# EAGLE board SAMD21_Pro_RF_1W-Panel (EAGLE 9.1.3), part 1 of 3
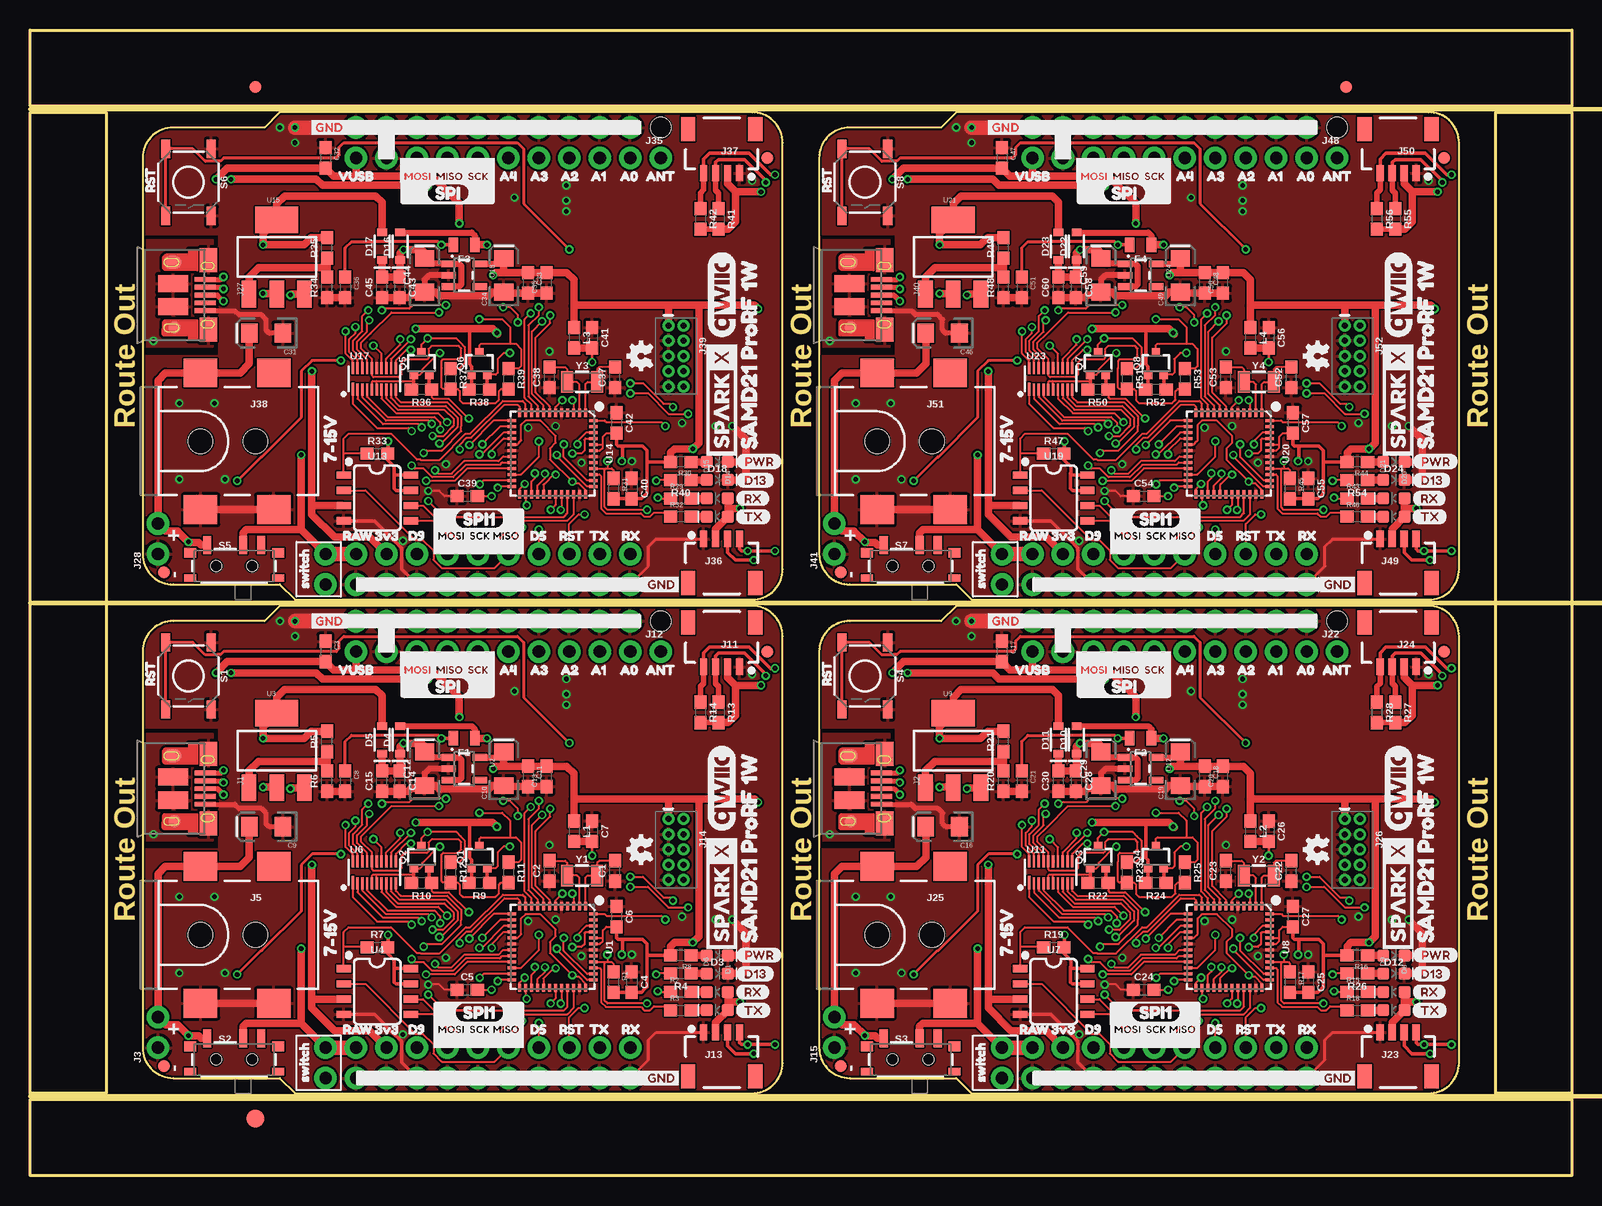
[diagram p0: board, top side]
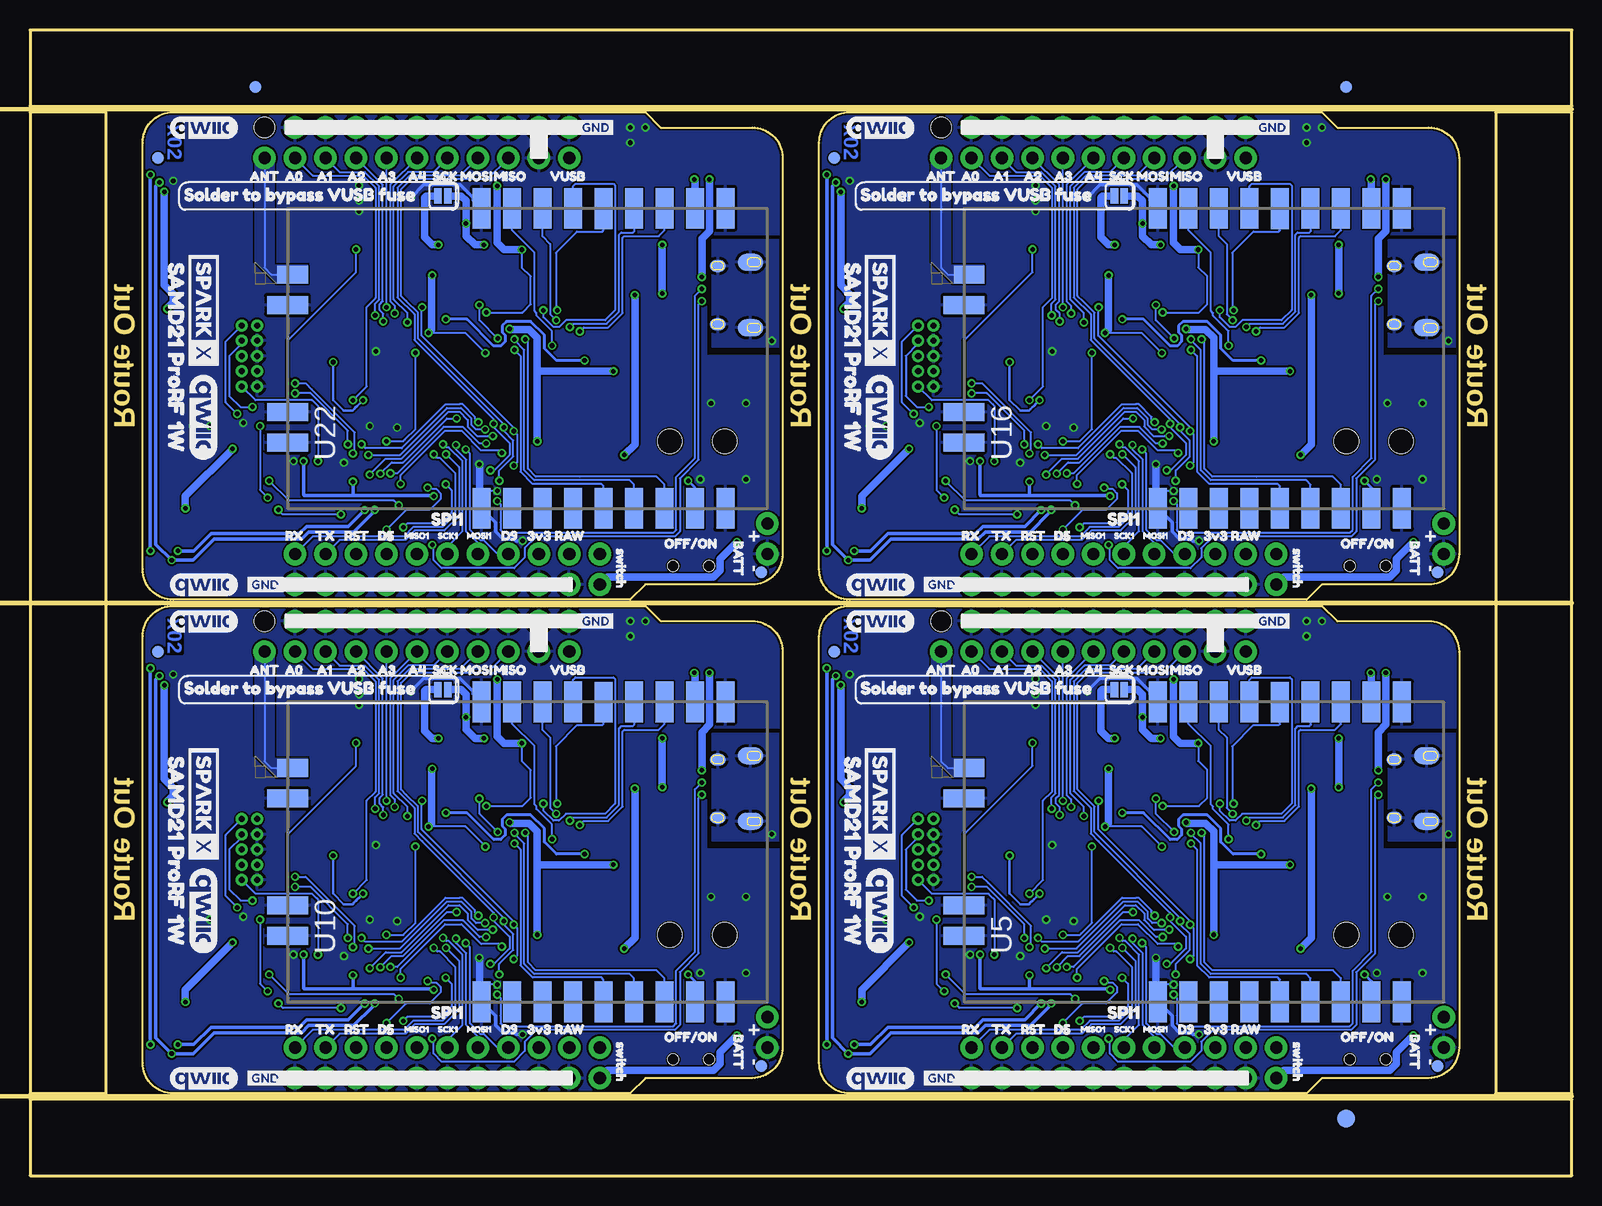
[diagram p1: board, bottom side, seen from below]

Size 128.52 x 95.5 mm. Coordinates in mm from the lower left corner, seen from the top.
Outline: 20.83,8.13 22.1,6.86 60.2,6.86 arc90 62.74,9.4 62.74,44.96 arc90 60.2,47.5 20.83,47.5 19.56,46.23 11.94,46.23 arc90 9.4,43.69 9.4,10.67 arc90 11.94,8.13 20.83,8.13
Outline: 77.22,8.13 78.49,6.86 116.59,6.86 arc90 119.13,9.4 119.13,44.96 arc90 116.59,47.5 77.22,47.5 75.95,46.23 68.33,46.23 arc90 65.79,43.69 65.79,10.67 arc90 68.33,8.13 77.22,8.13
Outline: 20.83,49.28 22.1,48.01 60.2,48.01 arc90 62.74,50.55 62.74,86.11 arc90 60.2,88.65 20.83,88.65 19.56,87.38 11.94,87.38 arc90 9.4,84.84 9.4,51.82 arc90 11.94,49.28 20.83,49.28
Outline: 77.22,49.28 78.49,48.01 116.59,48.01 arc90 119.13,50.55 119.13,86.11 arc90 116.59,88.65 77.22,88.65 75.95,87.38 68.33,87.38 arc90 65.79,84.84 65.79,51.82 arc90 68.33,49.28 77.22,49.28
Outline: 0,6.35 128.52,6.35 128.52,0 0,0 0,6.35
Outline: 122.17,88.65 128.52,88.65 128.52,6.86 122.17,6.86 122.17,88.65
Outline: 0,95.5 128.52,95.5 128.52,89.15 0,89.15 0,95.5
Outline: 0,88.65 6.35,88.65 6.35,6.86 0,6.86 0,88.65
Copper layers (1*16): Top 0.035mm / dielectric 1.5mm / Bottom 0.035mm
Design rules "SparkFun-2-layer-PCBWay-LIMIT": minimum track width 6mil, minimum drill 0.3mm, track to track 6mil, track to pad 6mil, pad to pad 6mil, via to via 6mil, smd to smd 6mil, copper to edge 6mil, drill to drill 6mil, minimum pad ring 6mil, minimum via ring 6mil, stop-mask expansion 4mil, vias tented up to drill 25mil, thermal gap 10mil
Net classes: 0 default: width 0 mm, drill 0 mm; 1 vcc: width 0 mm
Holes 1.7 mm at 52.58,46.23 108.97,46.23 52.58,87.38 108.97,87.38
Milling: 3 lines

## Footprints (pad centres in the part's own frame; a part is rotated, then mirrored left to right if it is on the bottom)
0603 = smd 1.1 x 1: 1 -0.85,0; 2 0.85,0
EIA3216 = smd 1.4 x 1.6: + 1.4,0; - -1.4,0
LED-0603 = smd 1 x 1: A -0.877,0; C 0.877,0
SOD-323 = smd 0.63 x 0.83: A 1.15,0; C -1.15,0
FIDUCIAL-1X2 = smd 1 x 1: 1 0,0
FIDUCIAL-1.5X3 = smd 1.5 x 1.5: 1 0,0
0805 = smd 0.8 x 1.2: 1 -0.9,0; 2 0.9,0
USB-MICROB-PTH-MILL = smd 0.4 x 1.75: D+ 0,0; D- -0.65,0; GND 1.3,0; ID 0.65,0; VBUS -1.3,0 | smd 2 x 1.46: SHIELD -2.9,0.275; SHIELD2 2.9,0.275 | smd 1.425 x 2.5: SHIELD3 -0.963,-2.675; SHIELD4 0.963,-2.675 | smd 1.4 x 2.1 bottom: SHIELD5 -2.731,-2.531; SHIELD7 2.729,-2.531 | smd 1 x 1: SHIELD6 2.7,-2.575 | smd 1.1 x 1.5: SHIELD8 -2.731,-2.731 | smd 1 x 1.3 bottom: SHIELD9 -2.43,0.195; SHIELD10 2.43,0.195
1X02_NO_SILK = drill 1.016 pad 1.88: 1 0,0; 2 2.54,0
POWER_JACK_SMD = smd 2.8 x 2.4: GND 0,-5.7; P$4 6.1,-5.7; VIN0 0,5.7; VIN1 6.1,5.7 | hole 2.032: 0,0; 4.572,0
1X10_NO_SILK = drill 1.016 pad 1.88: 1 0,0; 2 2.54,0; 3 5.08,0; 4 7.62,0; 5 10.16,0; 6 12.7,0; 7 15.24,0; 8 17.78,0; 9 20.32,0; 10 22.86,0
1X09_NO_SILK = drill 1.016 pad 1.88: 1 0,0; 2 2.54,0; 3 5.08,0; 4 7.62,0; 5 10.16,0; 6 12.7,0; 7 15.24,0; 8 17.78,0; 9 20.32,0
1X04_1MM_RA = smd 0.6 x 1.35: 1 -1.5,0; 2 -0.5,0; 3 0.5,0; 4 1.5,0 | smd 1.2 x 2: NC1 2.8,-3.675; NC2 -2.8,-3.675
1X01_NO_SILK = drill 1.016 pad 1.88: 1 0,0
2X5-PTH-1.27MM = drill 0.508 pad 1: 1 -2.54,-0.635; 2 -2.54,0.635; 3 -1.27,-0.635; 4 -1.27,0.635; 5 0,-0.635; 6 0,0.635; 7 1.27,-0.635; 8 1.27,0.635; 9 2.54,-0.635; 10 2.54,0.635
SMT-JUMPER_2_NO_SILK = smd 0.635 x 1.27: 1 -0.406,0; 2 0.406,0
SOT323 = smd 0.7 x 0.7: 1 -0.65,-0.925; 2 0.65,-0.925; 3 0,0.925
TACTILE_SWITCH_SMD_5.2MM = smd 1.524 x 0.762: 1 -2.794,1.905; 2 2.794,1.905; 3 -2.794,-1.905; 4 2.794,-1.905
SWITCH_SPST_SMD_A = smd 0.7 x 1.5: 1 -2.25,-1.75; 2 -0.75,-1.75; 3 2.25,-1.75 | smd 1 x 0.6: GND1 -3.65,1; GND3 3.65,1 | smd 1 x 0.8: GND2 -3.65,-1.1; GND4 3.65,-1.1 | hole 0.9: -1.5,0; 1.5,0
QFN-48_NO_EXPOSED_PAD = smd 0.7 x 0.25: 1 -3.4,2.75; 2 -3.4,2.25; 3 -3.4,1.75; 4 -3.4,1.25; 5 -3.4,0.75; 6 -3.4,0.25; 7 -3.4,-0.25; 8 -3.4,-0.75; 9 -3.4,-1.25; 10 -3.4,-1.75; 11 -3.4,-2.25; 12 -3.4,-2.75; 25 3.4,-2.75; 26 3.4,-2.25; 27 3.4,-1.75; 28 3.4,-1.25; 29 3.4,-0.75; 30 3.4,-0.25; 31 3.4,0.25; 32 3.4,0.75; 33 3.4,1.25; 34 3.4,1.75; 35 3.4,2.25; 36 3.4,2.75 | smd 0.25 x 0.7: 13 -2.75,-3.4; 14 -2.25,-3.4; 15 -1.75,-3.4; 16 -1.25,-3.4; 17 -0.75,-3.4; 18 -0.25,-3.4; 19 0.25,-3.4; 20 0.75,-3.4; 21 1.25,-3.4; 22 1.75,-3.4; 23 2.25,-3.4; 24 2.75,-3.4; 37 2.75,3.4; 38 2.25,3.4; 39 1.75,3.4; 40 1.25,3.4; 41 0.75,3.4; 42 0.25,3.4; 43 -0.25,3.4; 44 -0.75,3.4; 45 -1.25,3.4; 46 -1.75,3.4; 47 -2.25,3.4; 48 -2.75,3.4
SOT23-5 = smd 0.55 x 1.2: 1 -0.95,-1.3; 2 0,-1.3; 3 0.95,-1.3; 4 0.95,1.3; 5 -0.95,1.3
SOT223 = smd 1.219 x 2.235: 1 -2.311,-3.099; 2 0,-3.099; 3 2.311,-3.099 | smd 3.6 x 2.2: 4 0,3.099
SO08 = smd 0.6 x 1.2: 1 -1.905,-2.8; 2 -0.635,-2.8; 3 0.635,-2.8; 4 1.905,-2.8; 5 1.905,2.8; 6 0.635,2.8; 7 -0.635,2.8; 8 -1.905,2.8
E19-915MS1W = smd 3.4 x 1.5: P$1 0,23.82; P$2 0,21.28; P$3 0,18.74; P$4 0,16.2; P$5 0,13.66; P$6 0,11.12; P$7 0,8.58; P$8 0,6.04; P$9 0,3.5; P$10 25,3.5; P$11 25,6.04; P$12 25,8.58; P$13 25,11.12; P$14 24.98,13.66; P$15 25,16.2; P$16 25,18.74; P$17 25,21.28; P$18 25,23.82 | smd 1.5 x 2.55: P$19 19.5,39.568 | smd 1.5 x 3.4: P$20 16.96,40; P$21 8.04,40; P$22 5.5,40
UFDFN-20 = smd 0.2 x 1.1: 1 -1.8,-0.85 | smd 0.2 x 1: 2 -1.4,-0.9; 3 -1,-0.9; 4 -0.6,-0.9; 5 -0.2,-0.9; 6 0.2,-0.9; 7 0.6,-0.9; 8 1,-0.9; 9 1.4,-0.9; 10 1.8,-0.9; 11 1.8,0.9; 12 1.4,0.9; 13 1,0.9; 14 0.6,0.9; 15 0.2,0.9; 16 -0.2,0.9; 17 -0.6,0.9; 18 -1,0.9; 19 -1.4,0.9; 20 -1.8,0.9
CRYSTAL-SMD-3.2X1.5MM = smd 1 x 1.8: P$1 -1.25,0; P$2 1.25,0

## Placement (x,y rotation side)
C1  15pF  [0603]  48.77,25.4 90 top
C2  15pF  [0603]  43.31,25.4 90 top
C3  0.1uF  [0603]  24.64,43.69 270 top
C4  0.1uF  [0603]  50.17,16.13 270 top
C5  0.1uF  [0603]  36.45,15.49 0 top
C6  0.1uF  [0603]  48.89,21.59 270 top
C7  0.1uF  [0603]  46.86,28.7 270 top
C8  4.7uF  [0603]  26.29,32.89 270 top
C9  10uF  [EIA3216]  19.69,29.08 180 top
C10  10uF  [EIA3216]  39.5,33.91 90 top
C11  1.0uF  [0603]  41.53,33.27 270 top
C12  10uF  [EIA3216]  32.89,33.91 90 top
C13  0.1uF  [0603]  43.05,33.27 90 top
C14  1.0uF  [0603]  30.81,32.89 270 top
C15  0.1uF  [0603]  29.34,32.89 90 top
C16  10uF  [EIA3216]  76.07,29.08 180 top
C17  0.1uF  [0603]  81.03,43.69 270 top
C18  1.0uF  [0603]  97.92,33.27 270 top
C19  10uF  [EIA3216]  95.88,33.91 90 top
C20  0.1uF  [0603]  99.44,33.27 90 top
C21  4.7uF  [0603]  82.68,32.89 270 top
C22  15pF  [0603]  105.16,25.4 90 top
C23  15pF  [0603]  99.69,25.4 90 top
C24  0.1uF  [0603]  92.84,15.49 0 top
C25  0.1uF  [0603]  106.55,16.13 270 top
C26  0.1uF  [0603]  103.25,28.7 270 top
C27  0.1uF  [0603]  105.28,21.59 270 top
C28  1.0uF  [0603]  87.2,32.89 270 top
C29  10uF  [EIA3216]  89.28,33.91 90 top
C30  0.1uF  [0603]  85.72,32.89 90 top
C31  10uF  [EIA3216]  19.69,70.23 180 top
C32  0.1uF  [0603]  24.64,84.84 270 top
C33  1.0uF  [0603]  41.53,74.42 270 top
C34  10uF  [EIA3216]  39.5,75.06 90 top
C35  0.1uF  [0603]  43.05,74.42 90 top
C36  4.7uF  [0603]  26.29,74.04 270 top
C37  15pF  [0603]  48.77,66.55 90 top
C38  15pF  [0603]  43.31,66.55 90 top
C39  0.1uF  [0603]  36.45,56.64 0 top
C40  0.1uF  [0603]  50.17,57.28 270 top
C41  0.1uF  [0603]  46.86,69.85 270 top
C42  0.1uF  [0603]  48.89,62.74 270 top
C43  1.0uF  [0603]  30.81,74.04 270 top
C44  10uF  [EIA3216]  32.89,75.06 90 top
C45  0.1uF  [0603]  29.34,74.04 90 top
C46  10uF  [EIA3216]  76.07,70.23 180 top
C47  0.1uF  [0603]  81.03,84.84 270 top
C48  1.0uF  [0603]  97.92,74.42 270 top
C49  10uF  [EIA3216]  95.88,75.06 90 top
C50  0.1uF  [0603]  99.44,74.42 90 top
C51  4.7uF  [0603]  82.68,74.04 270 top
C52  15pF  [0603]  105.16,66.55 90 top
C53  15pF  [0603]  99.69,66.55 90 top
C54  0.1uF  [0603]  92.84,56.64 0 top
C55  0.1uF  [0603]  106.55,57.28 270 top
C56  0.1uF  [0603]  103.25,69.85 270 top
C57  0.1uF  [0603]  105.28,62.74 270 top
C58  1.0uF  [0603]  87.2,74.04 270 top
C59  10uF  [EIA3216]  89.28,75.06 90 top
C60  0.1uF  [0603]  85.72,74.04 90 top
D1  Yellow  [LED-0603]  57.3,15.3 180 top
D2  Green  [LED-0603]  57.3,13.78 180 top
D3  BLUE  [LED-0603]  57.3,16.84 0 top
D4  3A/10V/300mV  [SOD-323]  30.86,36.32 90 top
D5  3A/10V/300mV  [SOD-323]  29.34,36.32 90 top
D6  RED  [LED-0603]  57.3,18.35 0 top
D7  Green  [LED-0603]  113.69,13.78 180 top
D8  Yellow  [LED-0603]  113.69,15.3 180 top
D9  RED  [LED-0603]  113.69,18.35 0 top
D10  3A/10V/300mV  [SOD-323]  87.25,36.32 90 top
D11  3A/10V/300mV  [SOD-323]  85.72,36.32 90 top
D12  BLUE  [LED-0603]  113.69,16.84 0 top
D13  Green  [LED-0603]  57.3,54.93 180 top
D14  Yellow  [LED-0603]  57.3,56.45 180 top
D15  RED  [LED-0603]  57.3,59.5 0 top
D16  3A/10V/300mV  [SOD-323]  30.86,77.47 90 top
D17  3A/10V/300mV  [SOD-323]  29.34,77.47 90 top
D18  BLUE  [LED-0603]  57.3,57.99 0 top
D19  Green  [LED-0603]  113.69,54.93 180 top
D20  Yellow  [LED-0603]  113.69,56.45 180 top
D21  RED  [LED-0603]  113.69,59.5 0 top
D22  3A/10V/300mV  [SOD-323]  87.25,77.47 90 top
D23  3A/10V/300mV  [SOD-323]  85.72,77.47 90 top
D24  BLUE  [LED-0603]  113.69,57.99 0 top
E$1  [FIDUCIAL-1X2]  18.8,90.74 0 top
E$2  [FIDUCIAL-1X2]  18.8,90.74 0 bottom
E$3  [FIDUCIAL-1X2]  109.73,90.74 0 top
E$4  [FIDUCIAL-1X2]  109.73,90.74 0 bottom
E$5  [FIDUCIAL-1.5X3]  18.8,4.76 0 top
E$6  [FIDUCIAL-1.5X3]  18.8,4.76 0 bottom
F1  6V 0.5A  [0805]  36.2,36.45 180 top
F2  6V 0.5A  [0805]  92.58,36.45 180 top
F3  6V 0.5A  [0805]  36.2,77.6 180 top
F4  6V 0.5A  [0805]  92.58,77.6 180 top
FD1  FIDUCIAL1X2  [FIDUCIAL-1X2]  61.47,43.69 0 bottom
FD2  FIDUCIAL1X2  [FIDUCIAL-1X2]  11.18,9.14 0 top
FD3  FIDUCIAL1X2  [FIDUCIAL-1X2]  11.18,9.14 0 bottom
FD4  FIDUCIAL1X2  [FIDUCIAL-1X2]  61.47,43.69 0 top
FD5  FIDUCIAL1X2  [FIDUCIAL-1X2]  67.56,9.14 0 bottom
FD6  FIDUCIAL1X2  [FIDUCIAL-1X2]  117.86,43.69 0 bottom
FD7  FIDUCIAL1X2  [FIDUCIAL-1X2]  67.56,9.14 0 top
FD8  FIDUCIAL1X2  [FIDUCIAL-1X2]  117.86,43.69 0 top
FD9  FIDUCIAL1X2  [FIDUCIAL-1X2]  11.18,50.29 0 bottom
FD10  FIDUCIAL1X2  [FIDUCIAL-1X2]  61.47,84.84 0 bottom
FD11  FIDUCIAL1X2  [FIDUCIAL-1X2]  11.18,50.29 0 top
FD12  FIDUCIAL1X2  [FIDUCIAL-1X2]  61.47,84.84 0 top
FD13  FIDUCIAL1X2  [FIDUCIAL-1X2]  67.56,50.29 0 bottom
FD14  FIDUCIAL1X2  [FIDUCIAL-1X2]  117.86,84.84 0 bottom
FD15  FIDUCIAL1X2  [FIDUCIAL-1X2]  67.56,50.29 0 top
FD16  FIDUCIAL1X2  [FIDUCIAL-1X2]  117.86,84.84 0 top
J1  [USB-MICROB-PTH-MILL]  14.61,32.26 270 top
J2  [USB-MICROB-PTH-MILL]  70.99,32.26 270 top
J3  PTH  [1X02_NO_SILK]  10.67,10.67 90 top
J4  [1X02_NO_SILK]  27.18,46.23 270 top
J5  5.5x2.1mm Barrel  [POWER_JACK_SMD]  14.22,20.07 0 top
J6  [1X10_NO_SILK]  27.18,10.67 0 top
J7  [1X09_NO_SILK]  29.72,43.69 0 top
J8  External On/Off  [1X02_NO_SILK]  24.64,10.67 270 top
J9  [1X09_NO_SILK]  29.72,46.23 0 top
J10  [1X10_NO_SILK]  27.18,8.13 0 top
J11  [1X04_1MM_RA]  57.66,42.42 180 top
J12  [1X01_NO_SILK]  52.58,43.69 0 top
J13  [1X04_1MM_RA]  57.66,11.94 0 top
J14  CORTEX_DEBUG_PTH  [2X5-PTH-1.27MM]  53.85,27.18 270 top
J15  PTH  [1X02_NO_SILK]  67.06,10.67 90 top
J16  [1X02_NO_SILK]  83.57,46.23 270 top
J17  External On/Off  [1X02_NO_SILK]  81.03,10.67 270 top
J18  [1X10_NO_SILK]  83.57,10.67 0 top
J19  [1X10_NO_SILK]  83.57,8.13 0 top
J20  [1X09_NO_SILK]  86.11,46.23 0 top
J21  [1X09_NO_SILK]  86.11,43.69 0 top
J22  [1X01_NO_SILK]  108.97,43.69 0 top
J23  [1X04_1MM_RA]  114.05,11.94 0 top
J24  [1X04_1MM_RA]  114.05,42.42 180 top
J25  5.5x2.1mm Barrel  [POWER_JACK_SMD]  70.61,20.07 0 top
J26  CORTEX_DEBUG_PTH  [2X5-PTH-1.27MM]  110.24,27.18 270 top
J27  [USB-MICROB-PTH-MILL]  14.61,73.41 270 top
J28  PTH  [1X02_NO_SILK]  10.67,51.82 90 top
J29  [1X02_NO_SILK]  27.18,87.38 270 top
J30  External On/Off  [1X02_NO_SILK]  24.64,51.82 270 top
J31  [1X10_NO_SILK]  27.18,51.82 0 top
J32  [1X10_NO_SILK]  27.18,49.28 0 top
J33  [1X09_NO_SILK]  29.72,87.38 0 top
J34  [1X09_NO_SILK]  29.72,84.84 0 top
J35  [1X01_NO_SILK]  52.58,84.84 0 top
J36  [1X04_1MM_RA]  57.66,53.09 0 top
J37  [1X04_1MM_RA]  57.66,83.57 180 top
J38  5.5x2.1mm Barrel  [POWER_JACK_SMD]  14.22,61.21 0 top
J39  CORTEX_DEBUG_PTH  [2X5-PTH-1.27MM]  53.85,68.33 270 top
J40  [USB-MICROB-PTH-MILL]  70.99,73.41 270 top
J41  PTH  [1X02_NO_SILK]  67.06,51.82 90 top
J42  [1X02_NO_SILK]  83.57,87.38 270 top
J43  External On/Off  [1X02_NO_SILK]  81.03,51.82 270 top
J44  [1X10_NO_SILK]  83.57,51.82 0 top
J45  [1X10_NO_SILK]  83.57,49.28 0 top
J46  [1X09_NO_SILK]  86.11,87.38 0 top
J47  [1X09_NO_SILK]  86.11,84.84 0 top
J48  [1X01_NO_SILK]  108.97,84.84 0 top
J49  [1X04_1MM_RA]  114.05,53.09 0 top
J50  [1X04_1MM_RA]  114.05,83.57 180 top
J51  5.5x2.1mm Barrel  [POWER_JACK_SMD]  70.61,61.21 0 top
J52  CORTEX_DEBUG_PTH  [2X5-PTH-1.27MM]  110.24,68.33 270 top
JP1  FuseBypass  [SMT-JUMPER_2_NO_SILK]  37.72,40.51 0 bottom
JP2  FuseBypass  [SMT-JUMPER_2_NO_SILK]  94.11,40.51 0 bottom
JP3  FuseBypass  [SMT-JUMPER_2_NO_SILK]  37.72,81.66 0 bottom
JP4  FuseBypass  [SMT-JUMPER_2_NO_SILK]  94.11,81.66 0 bottom
L1  [0603]  45.34,28.7 270 top
L2  [0603]  101.73,28.7 270 top
L3  [0603]  45.34,69.85 270 top
L4  [0603]  101.73,69.85 270 top
Q1  310mA/60V/1.6Ω  [SOT323]  37.47,26.54 0 top
Q2  310mA/60V/1.6Ω  [SOT323]  32.64,26.54 0 top
Q3  310mA/60V/1.6Ω  [SOT323]  89.03,26.54 0 top
Q4  310mA/60V/1.6Ω  [SOT323]  93.85,26.54 0 top
Q5  310mA/60V/1.6Ω  [SOT323]  32.64,67.69 0 top
Q6  310mA/60V/1.6Ω  [SOT323]  37.47,67.69 0 top
Q7  310mA/60V/1.6Ω  [SOT323]  89.03,67.69 0 top
Q8  310mA/60V/1.6Ω  [SOT323]  93.85,67.69 0 top
R1  10k  [0603]  48.64,16.13 270 top
R2  1k  [0603]  54.25,15.3 0 top
R3  1k  [0603]  54.25,13.78 0 top
R4  1k  [0603]  54.25,16.84 180 top
R5  240  [0603]  24.77,36.2 90 top
R6  750  [0603]  24.77,32.89 90 top
R7  10k  [0603]  28.96,19.02 0 top
R8  1k  [0603]  54.25,18.35 180 top
R9  10k  [0603]  37.47,24.38 180 top
R10  10k  [0603]  32.64,24.38 180 top
R11  10k  [0603]  39.88,25.27 270 top
R12  10k  [0603]  35.05,25.27 270 top
R13  2.2k  [0603]  57.4,38.61 270 top
R14  2.2k  [0603]  55.88,38.61 270 top
R15  1k  [0603]  110.64,15.3 0 top
R16  1k  [0603]  110.64,18.35 180 top
R17  10k  [0603]  105.03,16.13 270 top
R18  1k  [0603]  110.64,13.78 0 top
R19  10k  [0603]  85.34,19.02 0 top
R20  750  [0603]  81.15,32.89 90 top
R21  240  [0603]  81.15,36.2 90 top
R22  10k  [0603]  89.03,24.38 180 top
R23  10k  [0603]  91.44,25.27 270 top
R24  10k  [0603]  93.85,24.38 180 top
R25  10k  [0603]  96.27,25.27 270 top
R26  1k  [0603]  110.64,16.84 180 top
R27  2.2k  [0603]  113.79,38.61 270 top
R28  2.2k  [0603]  112.27,38.61 270 top
R29  1k  [0603]  54.25,56.45 0 top
R30  1k  [0603]  54.25,59.5 180 top
R31  10k  [0603]  48.64,57.28 270 top
R32  1k  [0603]  54.25,54.93 0 top
R33  10k  [0603]  28.96,60.17 0 top
R34  750  [0603]  24.77,74.04 90 top
R35  240  [0603]  24.77,77.34 90 top
R36  10k  [0603]  32.64,65.53 180 top
R37  10k  [0603]  35.05,66.42 270 top
R38  10k  [0603]  37.47,65.53 180 top
R39  10k  [0603]  39.88,66.42 270 top
R40  1k  [0603]  54.25,57.99 180 top
R41  2.2k  [0603]  57.4,79.76 270 top
R42  2.2k  [0603]  55.88,79.76 270 top
R43  1k  [0603]  110.64,56.45 0 top
R44  1k  [0603]  110.64,59.5 180 top
R45  10k  [0603]  105.03,57.28 270 top
R46  1k  [0603]  110.64,54.93 0 top
R47  10k  [0603]  85.34,60.17 0 top
R48  750  [0603]  81.15,74.04 90 top
R49  240  [0603]  81.15,77.34 90 top
R50  10k  [0603]  89.03,65.53 180 top
R51  10k  [0603]  91.44,66.42 270 top
R52  10k  [0603]  93.85,65.53 180 top
R53  10k  [0603]  96.27,66.42 270 top
R54  1k  [0603]  110.64,57.99 180 top
R55  2.2k  [0603]  113.79,79.76 270 top
R56  2.2k  [0603]  112.27,79.76 270 top
S1  MOMENTARY-SWITCH-SPST-SMD-5.2-REDUNDANT  [TACTILE_SWITCH_SMD_5.2MM]  13.21,41.66 270 top
S2  Power  [SWITCH_SPST_SMD_A]  17.02,9.68 180 top
S3  Power  [SWITCH_SPST_SMD_A]  73.41,9.68 180 top
S4  MOMENTARY-SWITCH-SPST-SMD-5.2-REDUNDANT  [TACTILE_SWITCH_SMD_5.2MM]  69.6,41.66 270 top
S5  Power  [SWITCH_SPST_SMD_A]  17.02,50.83 180 top
S6  MOMENTARY-SWITCH-SPST-SMD-5.2-REDUNDANT  [TACTILE_SWITCH_SMD_5.2MM]  13.21,82.8 270 top
S7  Power  [SWITCH_SPST_SMD_A]  73.41,50.83 180 top
S8  MOMENTARY-SWITCH-SPST-SMD-5.2-REDUNDANT  [TACTILE_SWITCH_SMD_5.2MM]  69.6,82.8 270 top
U1  ATSAMD21G  [QFN-48_NO_EXPOSED_PAD]  43.56,19.05 270 top
U2  3.3V  [SOT23-5]  36.2,33.91 270 top
U3  ADJ5  [SOT223]  20.57,35.43 0 top
U4  4MB Flash  [SO08]  28.96,15.34 270 top
U5  E19-915MS1W  [E19-915MS1W]  10.67,14.48 90 bottom
U6  TXB0108DQSR  [UFDFN-20]  28.7,25.27 0 top
U7  4MB Flash  [SO08]  85.34,15.34 270 top
U8  ATSAMD21G  [QFN-48_NO_EXPOSED_PAD]  99.95,19.05 270 top
U9  ADJ5  [SOT223]  76.96,35.43 0 top
U10  E19-915MS1W  [E19-915MS1W]  67.06,14.48 90 bottom
U11  TXB0108DQSR  [UFDFN-20]  85.09,25.27 0 top
U12  3.3V  [SOT23-5]  92.58,33.91 270 top
U13  4MB Flash  [SO08]  28.96,56.49 270 top
U14  ATSAMD21G  [QFN-48_NO_EXPOSED_PAD]  43.56,60.2 270 top
U15  ADJ5  [SOT223]  20.57,76.58 0 top
U16  E19-915MS1W  [E19-915MS1W]  10.67,55.63 90 bottom
U17  TXB0108DQSR  [UFDFN-20]  28.7,66.42 0 top
U18  3.3V  [SOT23-5]  36.2,75.06 270 top
U19  4MB Flash  [SO08]  85.34,56.49 270 top
U20  ATSAMD21G  [QFN-48_NO_EXPOSED_PAD]  99.95,60.2 270 top
U21  ADJ5  [SOT223]  76.96,76.58 0 top
U22  E19-915MS1W  [E19-915MS1W]  67.06,55.63 90 bottom
U23  TXB0108DQSR  [UFDFN-20]  85.09,66.42 0 top
U24  3.3V  [SOT23-5]  92.58,75.06 270 top
U$1  [VUSB7]  25.02,42.16 0 top
U$2  [MISO4]  37.97,12.19 0 top
U$3  [A43]  38.48,42.16 0 top
U$4  [A34]  41.02,42.16 0 top
U$5  [A25]  43.56,42.16 0 top
U$6  [A16]  46.1,42.16 0 top
U$7  [A07]  48.51,42.16 0 top
U$8  [SPI2]  32.89,40.77 0 top
U$9  [MOSI3]  30.61,42.16 0 top
U$10  [MISO4]  33.27,42.16 0 top
U$11  [ANT11]  50.67,42.16 0 top
U$12  [GND0]  23.11,46.23 0 top
U$13  [RST2]  43.43,12.19 0 top
U$14  [VUSB7]  29.46,42.16 0 bottom
U$15  [D90]  30.86,12.19 0 top
U$16  [D90]  33.53,12.19 0 bottom
U$17  [GND0]  50.8,8.13 0 top
U$18  [SCK5]  36.07,12.19 0 top
U$19  [RX2]  51.56,12.19 0 bottom
U$20  [MOSI3]  33.4,12.19 0 top
U$21  [SPI11]  35.18,13.59 0 top
U$22  [MISO17]  41.4,12.19 0 bottom
U$23  [3V320]  28.07,12.19 0 top
U$24  [RAW21]  25.4,12.19 0 top
U$25  [7#15V0]  25.02,17.4 90 top
U$26  [SAMD21_PRORF_1W5]  59.94,36.07 270 bottom
U$27  [SWITCH6]  22.86,7.11 90 top
U$28  [RST2]  10.03,40.13 90 top
U$29  [A43]  94.87,42.16 0 top
U$30  [QWIIC_COPYRIGHT_MEDIUM]  57.66,22.1 270 bottom
U$31  [MOSI16]  36.2,12.19 0 bottom
U$32  [BATT25]  13.08,12.45 270 bottom
U$33  [D50]  43.81,12.19 0 bottom
U$34  SPARKX-LOGO4  [SPARKX-MEDIUM]  57.66,23.5 90 top
U$35  [SOLDER_TO_BYPASS_VUSB_FUSE1]  60.2,40.64 0 bottom
U$36  [OFF#ON1]  19.94,11.56 0 bottom
U$37  [SWITCH6]  22.86,11.81 270 bottom
U$38  [GND0]  26.8,46.23 0 bottom
U$39  [SCK5]  35.94,42.16 0 top
U$40  [A34]  97.41,42.16 0 top
U$41  [RST2]  46.61,12.19 0 bottom
U$42  [A43]  41.27,42.16 0 bottom
U$43  [A34]  43.81,42.16 0 bottom
U$44  [A25]  46.36,42.16 0 bottom
U$45  [A16]  48.89,42.16 0 bottom
U$46  [A07]  51.56,42.16 0 bottom
U$47  [MISO8]  34.16,42.16 0 bottom
U$48  [MOSI9]  36.96,42.16 0 bottom
U$49  [SCK10]  39.24,42.16 0 bottom
U$50  [ANT11]  54.48,42.16 0 bottom
U$51  [QWIIC_COPYRIGHT_MEDIUM]  57.66,32.26 90 top
U$52  [RAW21]  29.08,12.19 0 bottom
U$53  [3V320]  31.37,12.19 0 bottom
U$54  [A25]  99.95,42.16 0 top
U$55  [D514]  41.02,12.19 0 top
U$56  [A16]  102.49,42.16 0 top
U$57  [TX3]  49.02,12.19 0 bottom
U$58  [SPARKX-MEDIUM]  57.66,30.99 270 bottom
U$59  [D130]  58.85,16.81 0 top
U$60  [SCK18]  38.61,12.19 0 bottom
U$61  [OSHW-LOGO-MINI]  50.93,27.18 90 top
U$62  [GND0]  54.36,8.13 0 bottom
U$63  [PWR-()-03]  58.9,18.38 0 top
U$64  [QWIIC_COPYRIGHT_SMALL]  57.66,8.13 0 bottom
U$65  [SPI11]  39.62,13.59 0 bottom
U$66  [A07]  104.9,42.16 0 top
U$67  [QWIIC_COPYRIGHT_SMALL]  57.66,46.23 0 bottom
U$68  [ANT11]  107.06,42.16 0 top
U$69  [TX3]  45.97,12.19 0 top
U$70  [TX6]  58.83,13.78 0 top
U$71  [GND0]  79.5,46.23 0 top
U$72  [RX7]  58.83,15.3 0 top
U$73  [RX2]  48.64,12.19 0 top
U$74  [RST2]  99.82,12.19 0 top
U$75  [3V320]  84.45,12.19 0 top
U$76  [RAW21]  81.79,12.19 0 top
U$77  [RST2]  66.42,40.13 90 top
U$78  [BATT25]  69.47,12.45 270 bottom
U$79  [GND0]  83.19,46.23 0 bottom
U$80  [RST2]  103,12.19 0 bottom
U$81  [SAMD21_PRORF_1W5]  59.94,18.29 90 top
U$82  [A43]  97.66,42.16 0 bottom
U$83  [A34]  100.2,42.16 0 bottom
U$84  [A25]  102.74,42.16 0 bottom
U$85  [A16]  105.28,42.16 0 bottom
U$86  [A07]  107.95,42.16 0 bottom
U$87  [MISO8]  90.55,42.16 0 bottom
U$88  [MOSI9]  93.34,42.16 0 bottom
U$89  [SCK10]  95.63,42.16 0 bottom
U$90  [ANT11]  110.87,42.16 0 bottom
U$91  [RAW21]  85.47,12.19 0 bottom
U$92  [3V320]  87.76,12.19 0 bottom
U$93  [GND0]  110.74,8.13 0 bottom
U$94  [PWR-()-03]  115.29,18.38 0 top
U$95  [TX3]  102.36,12.19 0 top
U$96  [TX6]  115.21,13.78 0 top
U$97  [RX7]  115.21,15.3 0 top
U$98  [RX2]  105.03,12.19 0 top
U$99  [D514]  97.41,12.19 0 top
U$100  [D90]  87.25,12.19 0 top
U$101  [D90]  89.92,12.19 0 bottom
U$102  [GND0]  107.19,8.13 0 top
U$103  [RX2]  107.95,12.19 0 bottom
U$104  [TX3]  105.41,12.19 0 bottom
U$105  [D50]  100.2,12.19 0 bottom
U$106  [OSHW-LOGO-MINI]  107.31,27.18 90 top
U$107  [SAMD21_PRORF_1W5]  116.33,18.29 90 top
U$108  [VUSB7]  81.41,42.16 0 top
U$109  [VUSB7]  85.85,42.16 0 bottom
U$110  [SWITCH6]  79.25,7.11 90 top
U$111  [SWITCH6]  79.25,11.81 270 bottom
U$112  [7#15V0]  81.41,17.4 90 top
U$113  [SOLDER_TO_BYPASS_VUSB_FUSE1]  116.59,40.64 0 bottom
U$114  SPARKX-LOGO4  [SPARKX-MEDIUM]  114.05,23.5 90 top
U$115  [SAMD21_PRORF_1W5]  116.33,36.07 270 bottom
U$116  [SPARKX-MEDIUM]  114.05,30.99 270 bottom
U$117  [D130]  115.24,16.81 0 top
U$118  [OFF#ON1]  76.33,11.56 0 bottom
U$119  [SPI2]  89.28,40.77 0 top
U$120  [MOSI3]  86.99,42.16 0 top
U$121  [MISO4]  89.66,42.16 0 top
U$122  [SCK5]  92.33,42.16 0 top
U$123  [MISO4]  94.36,12.19 0 top
U$124  [SCK5]  92.46,12.19 0 top
U$125  [MOSI3]  89.79,12.19 0 top
U$126  [SPI11]  91.57,13.59 0 top
U$127  [SPI11]  96.01,13.59 0 bottom
U$128  [MISO17]  97.79,12.19 0 bottom
U$129  [MOSI16]  92.58,12.19 0 bottom
U$130  [SCK18]  95,12.19 0 bottom
U$131  [QWIIC_COPYRIGHT_SMALL]  114.05,8.13 0 bottom
U$132  [QWIIC_COPYRIGHT_SMALL]  114.05,46.23 0 bottom
U$133  [QWIIC_COPYRIGHT_MEDIUM]  114.05,22.1 270 bottom
U$134  [QWIIC_COPYRIGHT_MEDIUM]  114.05,32.26 90 top
U$135  [A43]  38.48,83.31 0 top
U$136  [A34]  41.02,83.31 0 top
U$137  [A25]  43.56,83.31 0 top
U$138  [A16]  46.1,83.31 0 top
U$139  [A07]  48.51,83.31 0 top
U$140  [ANT11]  50.67,83.31 0 top
U$141  [GND0]  23.11,87.38 0 top
U$142  [RST2]  43.43,53.34 0 top
U$143  [3V320]  28.07,53.34 0 top
U$144  [RAW21]  25.4,53.34 0 top
U$145  [RST2]  10.03,81.28 90 top
U$146  [BATT25]  13.08,53.59 270 bottom
U$147  [GND0]  26.8,87.38 0 bottom
U$148  [RST2]  46.61,53.34 0 bottom
U$149  [A43]  41.27,83.31 0 bottom
U$150  [A34]  43.81,83.31 0 bottom
U$151  [A25]  46.36,83.31 0 bottom
U$152  [A16]  48.89,83.31 0 bottom
U$153  [A07]  51.56,83.31 0 bottom
U$154  [MISO8]  34.16,83.31 0 bottom
U$155  [MOSI9]  36.96,83.31 0 bottom
U$156  [SCK10]  39.24,83.31 0 bottom
U$157  [ANT11]  54.48,83.31 0 bottom
U$158  [RAW21]  29.08,53.34 0 bottom
U$159  [3V320]  31.37,53.34 0 bottom
U$160  [GND0]  54.36,49.28 0 bottom
U$161  [PWR-()-03]  58.9,59.52 0 top
U$162  [TX3]  45.97,53.34 0 top
U$163  [TX6]  58.83,54.93 0 top
U$164  [RX7]  58.83,56.45 0 top
U$165  [RX2]  48.64,53.34 0 top
U$166  [D514]  41.02,53.34 0 top
U$167  [D90]  30.86,53.34 0 top
U$168  [D90]  33.53,53.34 0 bottom
U$169  [GND0]  50.8,49.28 0 top
U$170  [RX2]  51.56,53.34 0 bottom
U$171  [TX3]  49.02,53.34 0 bottom
U$172  [D50]  43.81,53.34 0 bottom
U$173  [OSHW-LOGO-MINI]  50.93,68.33 90 top
U$174  [SAMD21_PRORF_1W5]  59.94,59.44 90 top
U$175  [VUSB7]  25.02,83.31 0 top
U$176  [VUSB7]  29.46,83.31 0 bottom
U$177  [SWITCH6]  22.86,48.26 90 top
U$178  [SWITCH6]  22.86,52.96 270 bottom
U$179  [7#15V0]  25.02,58.55 90 top
U$180  [SOLDER_TO_BYPASS_VUSB_FUSE1]  60.2,81.79 0 bottom
U$181  SPARKX-LOGO4  [SPARKX-MEDIUM]  57.66,64.64 90 top
U$182  [SAMD21_PRORF_1W5]  59.94,77.22 270 bottom
U$183  [SPARKX-MEDIUM]  57.66,72.14 270 bottom
U$184  [D130]  58.85,57.96 0 top
U$185  [OFF#ON1]  19.94,52.7 0 bottom
U$186  [SPI2]  32.89,81.92 0 top
U$187  [MOSI3]  30.61,83.31 0 top
U$188  [MISO4]  33.27,83.31 0 top
U$189  [SCK5]  35.94,83.31 0 top
U$190  [MISO4]  37.97,53.34 0 top
U$191  [SCK5]  36.07,53.34 0 top
U$192  [MOSI3]  33.4,53.34 0 top
U$193  [SPI11]  35.18,54.74 0 top
U$194  [SPI11]  39.62,54.74 0 bottom
U$195  [MISO17]  41.4,53.34 0 bottom
U$196  [MOSI16]  36.2,53.34 0 bottom
U$197  [SCK18]  38.61,53.34 0 bottom
U$198  [QWIIC_COPYRIGHT_SMALL]  57.66,49.28 0 bottom
U$199  [QWIIC_COPYRIGHT_SMALL]  57.66,87.38 0 bottom
U$200  [QWIIC_COPYRIGHT_MEDIUM]  57.66,63.25 270 bottom
U$201  [QWIIC_COPYRIGHT_MEDIUM]  57.66,73.41 90 top
U$202  [A43]  94.87,83.31 0 top
U$203  [A34]  97.41,83.31 0 top
U$204  [A25]  99.95,83.31 0 top
U$205  [A16]  102.49,83.31 0 top
U$206  [A07]  104.9,83.31 0 top
U$207  [ANT11]  107.06,83.31 0 top
U$208  [GND0]  79.5,87.38 0 top
U$209  [RST2]  99.82,53.34 0 top
U$210  [3V320]  84.45,53.34 0 top
U$211  [RAW21]  81.79,53.34 0 top
U$212  [RST2]  66.42,81.28 90 top
U$213  [BATT25]  69.47,53.59 270 bottom
U$214  [GND0]  83.19,87.38 0 bottom
U$215  [RST2]  103,53.34 0 bottom
U$216  [A43]  97.66,83.31 0 bottom
U$217  [A34]  100.2,83.31 0 bottom
U$218  [A25]  102.74,83.31 0 bottom
U$219  [A16]  105.28,83.31 0 bottom
U$220  [A07]  107.95,83.31 0 bottom
U$221  [MISO8]  90.55,83.31 0 bottom
U$222  [MOSI9]  93.34,83.31 0 bottom
U$223  [SCK10]  95.63,83.31 0 bottom
U$224  [ANT11]  110.87,83.31 0 bottom
U$225  [RAW21]  85.47,53.34 0 bottom
U$226  [3V320]  87.76,53.34 0 bottom
U$227  [GND0]  110.74,49.28 0 bottom
U$228  [PWR-()-03]  115.29,59.52 0 top
U$229  [TX3]  102.36,53.34 0 top
U$230  [TX6]  115.21,54.93 0 top
U$231  [RX7]  115.21,56.45 0 top
U$232  [RX2]  105.03,53.34 0 top
U$233  [D514]  97.41,53.34 0 top
U$234  [D90]  87.25,53.34 0 top
U$235  [D90]  89.92,53.34 0 bottom
U$236  [GND0]  107.19,49.28 0 top
U$237  [RX2]  107.95,53.34 0 bottom
U$238  [TX3]  105.41,53.34 0 bottom
U$239  [D50]  100.2,53.34 0 bottom
U$240  [OSHW-LOGO-MINI]  107.31,68.33 90 top
U$241  [SAMD21_PRORF_1W5]  116.33,59.44 90 top
U$242  [VUSB7]  81.41,83.31 0 top
U$243  [VUSB7]  85.85,83.31 0 bottom
U$244  [SWITCH6]  79.25,48.26 90 top
U$245  [SWITCH6]  79.25,52.96 270 bottom
U$246  [7#15V0]  81.41,58.55 90 top
U$247  [SOLDER_TO_BYPASS_VUSB_FUSE1]  116.59,81.79 0 bottom
U$248  SPARKX-LOGO4  [SPARKX-MEDIUM]  114.05,64.64 90 top
U$249  [SAMD21_PRORF_1W5]  116.33,77.22 270 bottom
U$250  [SPARKX-MEDIUM]  114.05,72.14 270 bottom
U$251  [D130]  115.24,57.96 0 top
U$252  [OFF#ON1]  76.33,52.7 0 bottom
U$253  [SPI2]  89.28,81.92 0 top
U$254  [MOSI3]  86.99,83.31 0 top
U$255  [MISO4]  89.66,83.31 0 top
U$256  [SCK5]  92.33,83.31 0 top
U$257  [MISO4]  94.36,53.34 0 top
U$258  [SCK5]  92.46,53.34 0 top
U$259  [MOSI3]  89.79,53.34 0 top
U$260  [SPI11]  91.57,54.74 0 top
U$261  [SPI11]  96.01,54.74 0 bottom
U$262  [MISO17]  97.79,53.34 0 bottom
U$263  [MOSI16]  92.58,53.34 0 bottom
U$264  [SCK18]  95,53.34 0 bottom
U$265  [QWIIC_COPYRIGHT_SMALL]  114.05,49.28 0 bottom
U$266  [QWIIC_COPYRIGHT_SMALL]  114.05,87.38 0 bottom
U$267  [QWIIC_COPYRIGHT_MEDIUM]  114.05,63.25 270 bottom
U$268  [QWIIC_COPYRIGHT_MEDIUM]  114.05,73.41 90 top
Y1  32.768kHz  [CRYSTAL-SMD-3.2X1.5MM]  46.04,25.02 0 top
Y2  32.768kHz  [CRYSTAL-SMD-3.2X1.5MM]  102.43,25.02 0 top
Y3  32.768kHz  [CRYSTAL-SMD-3.2X1.5MM]  46.04,66.17 0 top
Y4  32.768kHz  [CRYSTAL-SMD-3.2X1.5MM]  102.43,66.17 0 top

## Library data of the parts
C1 C2 C22 C23 C37 C38 C52 C53 = SparkFun-Capacitors; PROD_ID: CAP-07881
C3-C7 C13 C15 C17 C20 C24-C27 C30 C32 C35 C39-C42 C45 C47 C50 C54-C57 C60 = SparkFun-Capacitors; PROD_ID: CAP-00810
C8 C21 C36 C51 = SparkFun-Capacitors; PROD_ID: CAP-08280
C9 C10 C12 C16 C19 C29 C31 C34 C44 C46 C49 C59 = SparkFun-Capacitors; PROD_ID: CAP-00811
C11 C14 C18 C28 C33 C43 C48 C58 = SparkFun-Capacitors; PROD_ID: CAP-00868
D1 D8 D14 D20 = SparkFun-LED; PROD_ID: DIO-09003
D2 D7 D13 D19 = SparkFun-LED; PROD_ID: DIO-00821
D3 D12 D18 D24 = SparkFun-LED; PROD_ID: DIO-08575
D4 D5 D10 D11 D16 D17 D22 D23 U5 U10 U16 U22 = SAMD21_ProRF_1W
D6 D9 D15 D21 = SparkFun-LED; PROD_ID: DIO-00819
E$1-E$4 FD1-FD16 U$61 U$106 U$173 U$240 = SparkFun-Aesthetics
E$5 E$6 = SparkFun-Retired
F1-F4 = SparkFun-Fuses
J1 J2 J27 J40 = SparkFun-Connectors; PROD_ID: CONN-13711
J3 J4 J7-J9 J12 J14-J17 J20-J22 J26 J28-J30 J33-J35 J39 J41-J43 J46-J48 J52 = SparkFun-Connectors
J5 J25 J38 J51 = SparkFun-Connectors; PROD_ID: CONN-08106; SF_ID: PRT-12748
J6 J10 J18 J19 J31 J32 J44 J45 = SparkFun-Connectors; PROD_ID: CONN-11563
J11 J13 J23 J24 J36 J37 J49 J50 = SparkFun-Connectors; PROD_ID: CONN-13694
JP1-JP4 = SparkFun-Jumpers
L1-L4 = SparkFun-Coils; PROD_ID: NDUC-07859
Q1-Q8 = SparkFun-DiscreteSemi; PROD_ID: TRANS-11151
R1 R7 R9-R12 R17 R19 R22-R25 R31 R33 R36-R39 R45 R47 R50-R53 = SparkFun-Resistors; PROD_ID: RES-00824
R2-R4 R8 R15 R16 R18 R26 R29 R30 R32 R40 R43 R44 R46 R54 = SparkFun-Resistors; PROD_ID: RES-07856
R5 R21 R35 R49 = SparkFun-Resistors; PROD_ID: RES-07849
R6 R20 R34 R48 = SparkFun-Resistors; PROD_ID: RES-07824
R13 R14 R27 R28 R41 R42 R55 R56 = SparkFun-Resistors; PROD_ID: RES-08272
S1 S4 S6 S8 = SparkFun-Switches; PROD_ID: SWCH-08247; SF_SKU: COM-08720
S2 S3 S5 S7 = SparkFun-Switches; PROD_ID: SWCH-10651; SF_SKU: COM-10860
U1 U8 U14 U20 = temp
U2 U12 U18 U24 = SparkFun-IC-Power; PROD_ID: VREG-12457
U3 U9 U15 U21 = SparkFun-IC-Power; PROD_ID: VREG-08170
U4 U7 U13 U19 = SparkFun-IC-Memory; PROD_ID: IC-12455
U6 U11 U17 U23 = SparkFun-IC-Comms; PROD_ID: IC-12292
U$1 U$2 U$8-U$10 U$14 U$18 U$20-U$22 U$25-U$27 U$31 U$35-U$37 U$39 U$59 U$60 U$65 U$81 U$107-U$113 U$115 U$117-U$130 U$174-U$180 U$182 U$184-U$197 U$241-U$247 U$249 U$251-U$264 = buzzard_labels
U$3-U$7 U$11-U$13 U$17 U$23 U$24 U$28 U$29 U$32 U$38 U$40-U$50 U$52-U$56 U$62 U$66 U$68 U$71 U$74-U$80 U$82-U$93 U$99 U$102 U$135-U$160 U$166 U$169 U$202-U$227 U$233 U$236 = buzzard_labels (25)
U$15 U$16 U$100 U$101 U$167 U$168 U$234 U$235 = buzzard_labels (10)
U$19 U$57 U$69 U$70 U$72 U$73 U$95-U$98 U$103 U$104 U$162-U$165 U$170 U$171 U$229-U$232 U$237 U$238 = buzzard_labels (8)
U$30 U$51 U$63 U$64 U$67 U$94 U$131-U$134 U$161 U$198-U$201 U$228 U$265-U$268 = Labels
U$33 U$105 U$172 U$239 = D5
U$34 U$58 U$114 U$116 U$181 U$183 U$248 U$250 = SparkX
Y1-Y4 = SparkFun-Clocks; PROD_ID: XTAL-13062

## Nets
3.3V [vcc]: C4.2 C5.2 C6.2 C10.+ C11.1 C13.2 D1.A D2.A J6.2 J11.2 J13.2 J14.1 L1.1 Q1.1 Q2.1 R1.2 R7.2 R8.2 R9.2 R10.2 R13.2 R14.2 U1.17 U1.36 U1.43 U1.44 U2.5 U4.3 U4.7 U4.8 U6.5 U6.6
3.3V1 [vcc]: C18.1 C19.+ C20.2 C24.2 C25.2 C27.2 D7.A D8.A J18.2 J23.2 J24.2 J26.1 L2.1 Q3.1 Q4.1 R16.2 R17.2 R19.2 R22.2 R24.2 R27.2 R28.2 U7.3 U7.7 U7.8 U8.17 U8.36 U8.43 U8.44 U11.5 U11.6 U12.5
3.3V2 [vcc]: C33.1 C34.+ C35.2 C39.2 C40.2 C42.2 D13.A D14.A J31.2 J36.2 J37.2 J39.1 L3.1 Q5.1 Q6.1 R30.2 R31.2 R33.2 R36.2 R38.2 R41.2 R42.2 U13.3 U13.7 U13.8 U14.17 U14.36 U14.43 U14.44 U17.5 U17.6 U18.5
3.3V3 [vcc]: C48.1 C49.+ C50.2 C54.2 C55.2 C57.2 D19.A D20.A J44.2 J49.2 J50.2 J52.1 L4.1 Q7.1 Q8.1 R44.2 R45.2 R47.2 R50.2 R52.2 R55.2 R56.2 U19.3 U19.7 U19.8 U20.17 U20.36 U20.43 U20.44 U23.5 U23.6 U24.5
5V [vcc]: C12.+ C14.1 C15.2 D4.C D5.C R11.2 R12.2 U2.1 U2.3 U5.P$11 U6.16
5V1 [vcc]: C28.1 C29.+ C30.2 D10.C D11.C R23.2 R25.2 U10.P$11 U11.16 U12.1 U12.3
5V2 [vcc]: C43.1 C44.+ C45.2 D16.C D17.C R37.2 R39.2 U16.P$11 U17.16 U18.1 U18.3
5V3 [vcc]: C58.1 C59.+ C60.2 D22.C D23.C R51.2 R53.2 U22.P$11 U23.16 U24.1 U24.3
!E19_CS: Q2.2 R10.1 U1.28
!E19_CS1: Q3.2 R22.1 U8.28
!E19_CS2: Q5.2 R36.1 U14.28
!E19_CS3: Q7.2 R50.1 U20.28
!E19_CS5V: Q2.3 R12.1 U5.P$15
!E19_CS5V1: Q3.3 R23.1 U10.P$15
!E19_CS5V2: Q5.3 R37.1 U16.P$15
!E19_CS5V3: Q7.3 R51.1 U22.P$15
!E19_RST: Q1.2 R9.1 U1.22
!E19_RST1: Q4.2 R24.1 U8.22
!E19_RST2: Q6.2 R38.1 U14.22
!E19_RST3: Q8.2 R52.1 U20.22
!E19_RST5V: Q1.3 R11.1 U5.P$8
!E19_RST5V1: Q4.3 R25.1 U10.P$8
!E19_RST5V2: Q6.3 R39.1 U16.P$8
!E19_RST5V3: Q8.3 R53.1 U22.P$8
!RST: J6.8 J14.10 R1.1 S1.3 S1.4 U1.40
!RST1: J18.8 J26.10 R17.1 S4.3 S4.4 U8.40
!RST2: J31.8 J39.10 R31.1 S6.3 S6.4 U14.40
!RST3: J44.8 J52.10 R45.1 S8.3 S8.4 U20.40
A0: J7.9 U1.3
A1: J7.8 U1.7
A2: J7.7 U1.8
A3: J7.6 U1.9
A4: J7.5 U1.10
A5: J21.9 U8.3
A6: J21.8 U8.7
A7: J21.7 U8.8
A8: J21.6 U8.9
A9: J21.5 U8.10
A10: J34.9 U14.3
A11: J34.8 U14.7
A12: J34.7 U14.8
A13: J34.6 U14.9
A14: J34.5 U14.10
A15: J47.9 U20.3
A16: J47.8 U20.7
A17: J47.7 U20.8
A18: J47.6 U20.9
A19: J47.5 U20.10
ANT: J12.1 U5.P$19
ANT1: J22.1 U10.P$19
ANT2: J35.1 U16.P$19
ANT3: J48.1 U22.P$19
D1: U8.27 U11.9
D2: U8.25 U11.10
D3: J18.7 U8.24
D4: J18.3 U8.12
D5: J6.7 U1.24
D6: R26.2 U8.26
D7: U14.27 U17.9
D8: U14.25 U17.10
D8_!FLASH_CS: R7.1 U1.11 U4.1
D8_!FLASH_CS1: R19.1 U7.1 U8.11
D8_!FLASH_CS2: R33.1 U13.1 U14.11
D8_!FLASH_CS3: R47.1 U19.1 U20.11
D9: J6.3 U1.12
D10: U1.27 U6.9
D11: U1.25 U6.10
D12: J31.7 U14.24
D13: R4.2 U1.26
D14: J31.3 U14.12
D15: R40.2 U14.26
D16: U20.27 U23.9
D17: U20.25 U23.10
D18: J44.7 U20.24
D19: J44.3 U20.12
D20: R54.2 U20.26
D+: J1.D+ U1.34
D+1: J2.D+ U8.34
D+2: J27.D+ U14.34
D+3: J40.D+ U20.34
D-: J1.D- U1.33
D-1: J2.D- U8.33
D-2: J27.D- U14.33
D-3: J40.D- U20.33
DIO05V: U5.P$7 U6.13
DIO05V1: U10.P$7 U11.13
DIO05V2: U16.P$7 U17.13
DIO05V3: U22.P$7 U23.13
DIO15V: U5.P$6 U6.12
DIO15V1: U10.P$6 U11.12
DIO15V2: U16.P$6 U17.12
DIO15V3: U22.P$6 U23.12
DIO25V: U5.P$5 U6.11
DIO25V1: U10.P$5 U11.11
DIO25V2: U16.P$5 U17.11
DIO25V3: U22.P$5 U23.11
E19_INT: U1.29 U6.8
E19_INT1: U8.29 U11.8
E19_INT2: U14.29 U17.8
E19_INT3: U20.29 U23.8
E19_RXEN: U1.38 U6.7
E19_RXEN1: U8.38 U11.7
E19_RXEN2: U14.38 U17.7
E19_RXEN3: U20.38 U23.7
E19_RXEN5V: U5.P$17 U6.14
E19_RXEN5V1: U10.P$17 U11.14
E19_RXEN5V2: U16.P$17 U17.14
E19_RXEN5V3: U22.P$17 U23.14
E19_TXEN: U1.37 U6.4
E19_TXEN1: U8.37 U11.4
E19_TXEN2: U14.37 U17.4
E19_TXEN3: U20.37 U23.4
E19_TXEN5V: U5.P$16 U6.17
E19_TXEN5V1: U10.P$16 U11.17
E19_TXEN5V2: U16.P$16 U17.17
E19_TXEN5V3: U22.P$16 U23.17
EEPROM_MISO: J6.6 U1.23 U4.2
EEPROM_MISO1: J18.6 U7.2 U8.23
EEPROM_MISO2: J31.6 U13.2 U14.23
EEPROM_MISO3: J44.6 U19.2 U20.23
EEPROM_MOSI: J6.4 U1.13 U4.5
EEPROM_MOSI1: J18.4 U7.5 U8.13
EEPROM_MOSI2: J31.4 U13.5 U14.13
EEPROM_MOSI3: J44.4 U19.5 U20.13
EEPROM_SCLK: J6.5 U1.14 U4.6
EEPROM_SCLK1: J18.5 U7.6 U8.14
EEPROM_SCLK2: J31.5 U13.6 U14.14
EEPROM_SCLK3: J44.5 U19.6 U20.14
GND: C1.1 C2.1 C3.1 C4.1 C5.1 C6.1 C7.1 C8.2 C9.- C10.- C11.2 C12.- C13.1 C14.2 C15.1 D3.C D6.C J1.GND J3.1 J4.1 J5.GND J5.P$4 J7.1 J9.1 J9.2 J9.3 J9.4 J9.5 J9.6 J9.7 J9.8 J9.9 J10.1 J10.2 J10.3 J10.4 J10.5 J10.6 J10.7 J10.8 J10.9 J10.10 J11.1 J13.1 J14.3 J14.5 J14.9 R6.1 S1.1 S1.2 U1.5 U1.18 U1.35 U1.42 U2.2 U4.4 U5.P$1 U5.P$9 U5.P$10 U5.P$18 U5.P$20 U5.P$21 U5.P$22 U6.15
GND1: C16.- C17.1 C18.2 C19.- C20.1 C21.2 C22.1 C23.1 C24.1 C25.1 C26.1 C27.1 C28.2 C29.- C30.1 D9.C D12.C J2.GND J15.1 J16.1 J19.1 J19.2 J19.3 J19.4 J19.5 J19.6 J19.7 J19.8 J19.9 J19.10 J20.1 J20.2 J20.3 J20.4 J20.5 J20.6 J20.7 J20.8 J20.9 J21.1 J23.1 J24.1 J25.GND J25.P$4 J26.3 J26.5 J26.9 R20.1 S4.1 S4.2 U7.4 U8.5 U8.18 U8.35 U8.42 U10.P$1 U10.P$9 U10.P$10 U10.P$18 U10.P$20 U10.P$21 U10.P$22 U11.15 U12.2
GND2: C31.- C32.1 C33.2 C34.- C35.1 C36.2 C37.1 C38.1 C39.1 C40.1 C41.1 C42.1 C43.2 C44.- C45.1 D15.C D18.C J27.GND J28.1 J29.1 J32.1 J32.2 J32.3 J32.4 J32.5 J32.6 J32.7 J32.8 J32.9 J32.10 J33.1 J33.2 J33.3 J33.4 J33.5 J33.6 J33.7 J33.8 J33.9 J34.1 J36.1 J37.1 J38.GND J38.P$4 J39.3 J39.5 J39.9 R34.1 S6.1 S6.2 U13.4 U14.5 U14.18 U14.35 U14.42 U16.P$1 U16.P$9 U16.P$10 U16.P$18 U16.P$20 U16.P$21 U16.P$22 U17.15 U18.2
GND3: C46.- C47.1 C48.2 C49.- C50.1 C51.2 C52.1 C53.1 C54.1 C55.1 C56.1 C57.1 C58.2 C59.- C60.1 D21.C D24.C J40.GND J41.1 J42.1 J45.1 J45.2 J45.3 J45.4 J45.5 J45.6 J45.7 J45.8 J45.9 J45.10 J46.1 J46.2 J46.3 J46.4 J46.5 J46.6 J46.7 J46.8 J46.9 J47.1 J49.1 J50.1 J51.GND J51.P$4 J52.3 J52.5 J52.9 R48.1 S8.1 S8.2 U19.4 U20.5 U20.18 U20.35 U20.42 U22.P$1 U22.P$9 U22.P$10 U22.P$18 U22.P$20 U22.P$21 U22.P$22 U23.15 U24.2
MISO: J7.2 U1.21 U6.2
MISO1: J21.2 U8.21 U11.2
MISO2: J34.2 U14.21 U17.2
MISO3: J47.2 U20.21 U23.2
MISO5V: U5.P$13 U6.19
MISO5V1: U10.P$13 U11.19
MISO5V2: U16.P$13 U17.19
MISO5V3: U22.P$13 U23.19
MOSI: J7.3 U1.19 U6.3
MOSI1: J21.3 U8.19 U11.3
MOSI2: J34.3 U14.19 U17.3
MOSI3: J47.3 U20.19 U23.3
MOSI5V: U5.P$14 U6.18
MOSI5V1: U10.P$14 U11.18
MOSI5V2: U16.P$14 U17.18
MOSI5V3: U22.P$14 U23.18
N$1: D1.C R2.2
N$2: D2.C R3.2
N$3: D3.A R4.1
N$4: D9.A R16.1
N$5: D8.C R15.2
N$6: C1.2 U1.1 Y1.P$2
N$7: C2.2 U1.2 Y1.P$1
N$8: D7.C R18.2
N$9: C22.2 U8.1 Y2.P$2
N$10: C23.2 U8.2 Y2.P$1
N$11: R20.2 R21.1 U9.1
N$12 [vcc]: D4.A F1.1 JP1.1
N$13: R5.1 R6.2 U3.1
N$14 [vcc]: D5.A R5.2 U3.2 U3.4
N$15 [vcc]: D10.A F2.1 JP2.1
N$16 [vcc]: D11.A R21.2 U9.2 U9.4
N$17: D12.A R26.1
N$18: D15.A R30.1
N$19: D14.C R29.2
N$20: D13.C R32.2
N$21: C37.2 U14.1 Y3.P$2
N$22: C38.2 U14.2 Y3.P$1
N$23: R34.2 R35.1 U15.1
N$24 [vcc]: D16.A F3.1 JP3.1
N$25 [vcc]: D17.A R35.2 U15.2 U15.4
N$26: D18.A R40.1
N$27: D21.A R44.1
N$28: D20.C R43.2
N$29: D19.C R46.2
N$30: C52.2 U20.1 Y4.P$2
N$31: C53.2 U20.2 Y4.P$1
N$32: R48.2 R49.1 U21.1
N$33 [vcc]: D22.A F4.1 JP4.1
N$34 [vcc]: D23.A R49.2 U21.2 U21.4
N$35: D24.A R54.1
N$38: D6.A R8.1
RAW [vcc]: J6.1 J8.1 S2.2 U3.3
RAW1 [vcc]: J17.1 J18.1 S3.2 U9.3
RAW2 [vcc]: J30.1 J31.1 S5.2 U15.3
RAW3 [vcc]: J43.1 J44.1 S7.2 U21.3
RX_LED: R2.1 U1.48
RX_LED1: R15.1 U8.48
RX_LED2: R29.1 U14.48
RX_LED3: R43.1 U20.48
RXI: J6.10 U1.16
RXI1: J18.10 U8.16
RXI2: J31.10 U14.16
RXI3: J44.10 U20.16
SCK: J7.4 U1.20 U6.1
SCK1: J21.4 U8.20 U11.1
SCK2: J34.4 U14.20 U17.1
SCK3: J47.4 U20.20 U23.1
SCK5V: U5.P$12 U6.20
SCK5V1: U10.P$12 U11.20
SCK5V2: U16.P$12 U17.20
SCK5V3: U22.P$12 U23.20
SCL: J11.4 J13.4 R14.1 U1.32
SCL1: J23.4 J24.4 R28.1 U8.32
SCL2: J36.4 J37.4 R42.1 U14.32
SCL3: J49.4 J50.4 R56.1 U20.32
SDA: J11.3 J13.3 R13.1 U1.31
SDA1: J23.3 J24.3 R27.1 U8.31
SDA2: J36.3 J37.3 R41.1 U14.31
SDA3: J49.3 J50.3 R55.1 U20.31
SHLD: J1.SHIELD J1.SHIELD2 J1.SHIELD3 J1.SHIELD4 J1.SHIELD5 J1.SHIELD6 J1.SHIELD7 J1.SHIELD8 J1.SHIELD9 J1.SHIELD10
SHLD1: J2.SHIELD J2.SHIELD2 J2.SHIELD3 J2.SHIELD4 J2.SHIELD5 J2.SHIELD6 J2.SHIELD7 J2.SHIELD8 J2.SHIELD9 J2.SHIELD10
SHLD2: J27.SHIELD J27.SHIELD2 J27.SHIELD3 J27.SHIELD4 J27.SHIELD5 J27.SHIELD6 J27.SHIELD7 J27.SHIELD8 J27.SHIELD9 J27.SHIELD10
SHLD3: J40.SHIELD J40.SHIELD2 J40.SHIELD3 J40.SHIELD4 J40.SHIELD5 J40.SHIELD6 J40.SHIELD7 J40.SHIELD8 J40.SHIELD9 J40.SHIELD10
SWDCLK: J14.4 U1.45
SWDCLK1: J26.4 U8.45
SWDCLK2: J39.4 U14.45
SWDCLK3: J52.4 U20.45
SWDIO: J14.2 U1.46
SWDIO1: J26.2 U8.46
SWDIO2: J39.2 U14.46
SWDIO3: J52.2 U20.46
TX_LED: R3.1 U1.39
TX_LED1: R18.1 U8.39
TX_LED2: R32.1 U14.39
TX_LED3: R46.1 U20.39
TXO: J6.9 U1.15
TXO1: J18.9 U8.15
TXO2: J31.9 U14.15
TXO3: J44.9 U20.15
USB_VCC [vcc]: C3.2 C8.1 F1.2 J1.VBUS J4.2 JP1.2
USB_VCC1 [vcc]: C17.2 C21.1 F2.2 J2.VBUS J16.2 JP2.2
USB_VCC2 [vcc]: C32.2 C36.1 F3.2 J27.VBUS J29.2 JP3.2
USB_VCC3 [vcc]: C47.2 C51.1 F4.2 J40.VBUS J42.2 JP4.2
VBATT: C9.+ J3.2 J5.VIN0 J8.2 S2.3
VBATT1: C16.+ J15.2 J17.2 J25.VIN0 S3.3
VBATT2: C31.+ J28.2 J30.2 J38.VIN0 S5.3
VBATT3: C46.+ J41.2 J43.2 J51.VIN0 S7.3
VDDANA [vcc]: C7.2 L1.2 U1.6
VDDANA1 [vcc]: C26.2 L2.2 U8.6
VDDANA2 [vcc]: C41.2 L3.2 U14.6
VDDANA3 [vcc]: C56.2 L4.2 U20.6

## Tracks (layer width: path | path; a pad name or v marks a point on that pad's centre or on a via)
3.3V  (via drill 0.38)
  Top 0.152: U6.5 28.5,25.02 28.59,25.1 28.88,25.1 | 31.99,25.02 31.91,25.1 28.88,25.1 | U6.6 28.9,25.08 28.88,25.1 | C5.2 v38.48,15.49 | U1.36 46.31,16 45.76,16.55 45.36,16.55 v45.21,16.7 43.35,18.56 43.35,19.47 43.83,19.95 43.83,20.51 42.56,21.78 41.29,21.78 40.96,21.45 40.96,20.13 40.89,20.07 40.63,19.8 U1.17 | U1.43 47.5,19.3 47.75,19.55 47.75,19.81 | C6.2 48.05,20.74 47.75,20.45 47.75,19.81 | Q2.1 32.51,25.62 32.71,25.82 32.71,26.09 34.05,27.42 v34.17,27.42 | U1.44 46.97,19.81 47.75,19.81
  Top 0.305: Q2.1 31.99,25.02 31.99,24.58 R10.2 | R1.2 C4.2 50.97,15.28 51.24,15.56 51.44,15.75 51.44,18.35 | U4.7 30.5,15.98 30.35,16.13 30.35,17.27 | 30.35,17.27 30.35,17.41 30.37,17.42 30.37,17.96 29.81,18.52 R7.2 29.84,19.06 v29.84,20.07 | U4.8 31.73,17.27 30.35,17.27 | 38.57,29.44 38.99,29.02 | R8.2 51.44,18.35 | 51.44,18.35 51.44,19.3 51.05,19.68 49.4,19.68 | 49.4,19.68 49.02,19.68 48.89,19.81 C6.2 | R9.2 36.81,24.58 Q1.1 36.81,26.3 36.63,26.49 36.63,29.37 36.7,29.44 | 49.4,19.68 49.4,18.49 v49.33,18.41
  Top 0.457: R13.2 R14.2
  Top 0.508: U2.5 39.05,34.86 C10.+
  Top 0.61: 39.5,34.12 C11.1 C13.2 44.74,34.12 45.34,33.53 45.34,31.37 | 39.5,34.12 38.82,34.12 v38.61,33.91 | R8.2 53.4,19.11 53.72,19.43 v55.25,19.43 55.75,19.94 55.75,26.8 55.75,28.45 55.75,29.72 55.75,31.28 55.88,31.41 | 38.99,29.02 v38.91,29.1 38.57,29.44 36.7,29.44 v32.15,29.44 | C10.+ 39.5,34.12 | J6.2 28.32,12.06 25.4,12.06 23.49,13.97 23.49,14.86 | U4.3 23.65,14.71 23.49,14.86 | 23.49,14.86 v23.49,25.91 | J13.2 57.16,12.76 D2.A 58.18,14.48 | 58.18,14.48 D1.A | 58.18,14.48 v59.18,14.48 | J11.2 58.16,41.54 58.82,40.87 | 58.82,40.87 v60.94,40.87 | v60.69,31.12 60.4,31.41 55.88,31.41 | R13.2 58.2,37.76 58.82,38.38 58.82,40.87 | 45.34,31.37 L1.1 | 45.34,31.37 45.38,31.41 53.09,31.41 | 55.88,31.41 53.09,31.41 | J14.1 53.21,31.28 53.09,31.41
  Bottom 0.152: v34.17,27.42 35.84,29.1 v38.91,29.1
  Bottom 0.305: v38.48,15.49 38.54,15.56 41.27,15.56 43.56,15.56 45.21,15.56 | 45.21,15.56 49.28,15.56 49.33,15.61 v49.33,18.41 | v45.21,16.7 45.21,15.56
  Bottom 0.61: v38.61,33.91 38.65,33.87 38.65,29.36 v38.91,29.1 | v59.18,14.48 59.18,15.49 v55.25,19.43 | v60.94,40.87 60.94,33.08 60.2,32.34 60.2,31.67 60.69,31.18 v60.69,31.12 | 29.84,25.91 29.84,28.69 30.53,29.38 31.24,29.38 | 29.84,25.91 v29.84,20.07 | v23.49,25.91 29.84,25.91 | 31.24,29.38 31.75,29.38 32.09,29.38 | v32.15,29.44 32.09,29.38 | 32.09,29.38 31.24,29.38
3.3V1  (via drill 0.38)
  Top 0.152: U11.5 84.89,25.02 84.97,25.1 85.27,25.1 | 88.38,25.02 88.29,25.1 85.27,25.1 | U11.6 85.29,25.08 85.27,25.1 | C24.2 v94.87,15.49 | U8.36 102.7,16 102.15,16.55 101.75,16.55 v101.6,16.7 99.74,18.56 99.74,19.47 100.22,19.95 100.22,20.51 98.95,21.78 97.68,21.78 97.35,21.45 97.35,20.13 97.28,20.07 97.02,19.8 U8.17 | U8.43 103.89,19.3 104.14,19.55 104.14,19.81 | C27.2 104.43,20.74 104.14,20.45 104.14,19.81 | Q3.1 88.9,25.62 89.1,25.82 89.1,26.09 90.44,27.42 v90.56,27.42 | U8.44 103.36,19.81 104.14,19.81
  Top 0.305: Q3.1 88.38,25.02 88.38,24.58 R22.2 | R17.2 C25.2 107.35,15.28 107.63,15.56 107.82,15.75 107.82,18.35 | U7.7 86.89,15.98 86.74,16.13 86.74,17.27 | 86.74,17.27 86.74,17.41 86.75,17.42 86.75,17.96 86.19,18.52 R19.2 86.23,19.06 v86.23,20.07 | U7.8 88.12,17.27 86.74,17.27 | 94.95,29.44 95.38,29.02 | R16.2 107.82,18.35 | 107.82,18.35 107.82,19.3 107.44,19.68 105.79,19.68 | 105.79,19.68 105.41,19.68 105.28,19.81 C27.2 | R24.2 93.2,24.58 Q4.1 93.2,26.3 93.02,26.49 93.02,29.37 93.09,29.44 | 105.79,19.68 105.79,18.49 v105.71,18.41
  Top 0.457: R27.2 R28.2
  Top 0.508: U12.5 95.44,34.86 C19.+
  Top 0.61: 95.88,34.12 C18.1 C20.2 101.13,34.12 101.73,33.53 101.73,31.37 | 95.88,34.12 95.21,34.12 v95,33.91 | R16.2 109.79,19.11 110.11,19.43 v111.63,19.43 112.14,19.94 112.14,26.8 112.14,28.45 112.14,29.72 112.14,31.28 112.27,31.41 | 95.38,29.02 v95.3,29.1 94.95,29.44 93.09,29.44 v88.54,29.44 | C19.+ 95.88,34.12 | J18.2 84.71,12.06 81.79,12.06 79.88,13.97 79.88,14.86 | U7.3 80.03,14.71 79.88,14.86 | 79.88,14.86 v79.88,25.91 | J23.2 113.55,12.76 D7.A 114.57,14.48 | 114.57,14.48 D8.A | 114.57,14.48 v115.57,14.48 | J24.2 114.55,41.54 115.21,40.87 | 115.21,40.87 v117.33,40.87 | v117.08,31.12 116.79,31.41 112.27,31.41 | R27.2 114.59,37.76 115.21,38.38 115.21,40.87 | 101.73,31.37 L2.1 | 101.73,31.37 101.77,31.41 109.47,31.41 | 112.27,31.41 109.47,31.41 | J26.1 109.6,31.28 109.47,31.41
  Bottom 0.152: v90.56,27.42 92.23,29.1 v95.3,29.1
  Bottom 0.305: v94.87,15.49 94.93,15.56 97.66,15.56 99.95,15.56 101.6,15.56 | 101.6,15.56 105.66,15.56 105.71,15.61 v105.71,18.41 | v101.6,16.7 101.6,15.56
  Bottom 0.61: v95,33.91 95.03,33.87 95.03,29.36 v95.3,29.1 | v115.57,14.48 115.57,15.49 v111.63,19.43 | v117.33,40.87 117.33,33.08 116.59,32.34 116.59,31.67 117.08,31.18 v117.08,31.12 | 86.23,25.91 86.23,28.69 86.92,29.38 87.63,29.38 | 86.23,25.91 v86.23,20.07 | v79.88,25.91 86.23,25.91 | 87.63,29.38 88.14,29.38 88.48,29.38 | v88.54,29.44 88.48,29.38 | 88.48,29.38 87.63,29.38
3.3V2  (via drill 0.38)
  Top 0.152: U17.5 28.5,66.17 28.59,66.25 28.88,66.25 | 31.99,66.17 31.91,66.25 28.88,66.25 | U17.6 28.9,66.23 28.88,66.25 | C39.2 v38.48,56.64 | U14.36 46.31,57.14 45.76,57.7 45.36,57.7 v45.21,57.85 43.35,59.71 43.35,60.62 43.83,61.1 43.83,61.66 42.56,62.93 41.29,62.93 40.96,62.59 40.96,61.28 40.89,61.21 40.63,60.95 U14.17 | U14.43 47.5,60.45 47.75,60.7 47.75,60.96 | C42.2 48.05,61.89 47.75,61.59 47.75,60.96 | Q5.1 32.51,66.77 32.71,66.96 32.71,67.23 34.05,68.57 v34.17,68.57 | U14.44 46.97,60.96 47.75,60.96
  Top 0.305: Q5.1 31.99,66.17 31.99,65.73 R36.2 | R31.2 C40.2 50.97,56.43 51.24,56.7 51.44,56.9 51.44,59.5 | U13.7 30.5,57.12 30.35,57.28 30.35,58.42 | 30.35,58.42 30.35,58.56 30.37,58.57 30.37,59.11 29.81,59.67 R33.2 29.84,60.21 v29.84,61.21 | U13.8 31.73,58.42 30.35,58.42 | 38.57,70.59 38.99,70.17 | R30.2 51.44,59.5 | 51.44,59.5 51.44,60.45 51.05,60.83 49.4,60.83 | 49.4,60.83 49.02,60.83 48.89,60.96 C42.2 | R38.2 36.81,65.73 Q6.1 36.81,67.45 36.63,67.64 36.63,70.51 36.7,70.59 | 49.4,60.83 49.4,59.64 v49.33,59.56
  Top 0.457: R41.2 R42.2
  Top 0.508: U18.5 39.05,76.01 C34.+
  Top 0.61: 39.5,75.27 C33.1 C35.2 44.74,75.27 45.34,74.68 45.34,72.52 | 39.5,75.27 38.82,75.27 v38.61,75.06 | R30.2 53.4,60.26 53.72,60.58 v55.25,60.58 55.75,61.09 55.75,67.95 55.75,69.6 55.75,70.87 55.75,72.43 55.88,72.56 | 38.99,70.17 v38.91,70.25 38.57,70.59 36.7,70.59 v32.15,70.59 | C34.+ 39.5,75.27 | J31.2 28.32,53.21 25.4,53.21 23.49,55.12 23.49,56.01 | U13.3 23.65,55.85 23.49,56.01 | 23.49,56.01 v23.49,67.06 | J36.2 57.16,53.91 D13.A 58.18,55.63 | 58.18,55.63 D14.A | 58.18,55.63 v59.18,55.63 | J37.2 58.16,82.69 58.82,82.02 | 58.82,82.02 v60.94,82.02 | v60.69,72.26 60.4,72.56 55.88,72.56 | R41.2 58.2,78.91 58.82,79.52 58.82,82.02 | 45.34,72.52 L3.1 | 45.34,72.52 45.38,72.56 53.09,72.56 | 55.88,72.56 53.09,72.56 | J39.1 53.21,72.43 53.09,72.56
  Bottom 0.152: v34.17,68.57 35.84,70.25 v38.91,70.25
  Bottom 0.305: v38.48,56.64 38.54,56.7 41.27,56.7 43.56,56.7 45.21,56.7 | 45.21,56.7 49.28,56.7 49.33,56.76 v49.33,59.56 | v45.21,57.85 45.21,56.7
  Bottom 0.61: v38.61,75.06 38.65,75.02 38.65,70.51 v38.91,70.25 | v59.18,55.63 59.18,56.64 v55.25,60.58 | v60.94,82.02 60.94,74.22 60.2,73.48 60.2,72.82 60.69,72.33 v60.69,72.26 | 29.84,67.06 29.84,69.84 30.53,70.52 31.24,70.52 | 29.84,67.06 v29.84,61.21 | v23.49,67.06 29.84,67.06 | 31.24,70.52 31.75,70.52 32.09,70.52 | v32.15,70.59 32.09,70.52 | 32.09,70.52 31.24,70.52
3.3V3  (via drill 0.38)
  Top 0.152: U23.5 84.89,66.17 84.97,66.25 85.27,66.25 | 88.38,66.17 88.29,66.25 85.27,66.25 | U23.6 85.29,66.23 85.27,66.25 | C54.2 v94.87,56.64 | U20.36 102.7,57.14 102.15,57.7 101.75,57.7 v101.6,57.85 99.74,59.71 99.74,60.62 100.22,61.1 100.22,61.66 98.95,62.93 97.68,62.93 97.35,62.59 97.35,61.28 97.28,61.21 97.02,60.95 U20.17 | U20.43 103.89,60.45 104.14,60.7 104.14,60.96 | C57.2 104.43,61.89 104.14,61.59 104.14,60.96 | Q7.1 88.9,66.77 89.1,66.96 89.1,67.23 90.44,68.57 v90.56,68.57 | U20.44 103.36,60.96 104.14,60.96
  Top 0.305: Q7.1 88.38,66.17 88.38,65.73 R50.2 | R45.2 C55.2 107.35,56.43 107.63,56.7 107.82,56.9 107.82,59.5 | U19.7 86.89,57.12 86.74,57.28 86.74,58.42 | 86.74,58.42 86.74,58.56 86.75,58.57 86.75,59.11 86.19,59.67 R47.2 86.23,60.21 v86.23,61.21 | U19.8 88.12,58.42 86.74,58.42 | 94.95,70.59 95.38,70.17 | R44.2 107.82,59.5 | 107.82,59.5 107.82,60.45 107.44,60.83 105.79,60.83 | 105.79,60.83 105.41,60.83 105.28,60.96 C57.2 | R52.2 93.2,65.73 Q8.1 93.2,67.45 93.02,67.64 93.02,70.51 93.09,70.59 | 105.79,60.83 105.79,59.64 v105.71,59.56
  Top 0.457: R55.2 R56.2
  Top 0.508: U24.5 95.44,76.01 C49.+
  Top 0.61: 95.88,75.27 C48.1 C50.2 101.13,75.27 101.73,74.68 101.73,72.52 | 95.88,75.27 95.21,75.27 v95,75.06 | R44.2 109.79,60.26 110.11,60.58 v111.63,60.58 112.14,61.09 112.14,67.95 112.14,69.6 112.14,70.87 112.14,72.43 112.27,72.56 | 95.38,70.17 v95.3,70.25 94.95,70.59 93.09,70.59 v88.54,70.59 | C49.+ 95.88,75.27 | J44.2 84.71,53.21 81.79,53.21 79.88,55.12 79.88,56.01 | U19.3 80.03,55.85 79.88,56.01 | 79.88,56.01 v79.88,67.06 | J49.2 113.55,53.91 D19.A 114.57,55.63 | 114.57,55.63 D20.A | 114.57,55.63 v115.57,55.63 | J50.2 114.55,82.69 115.21,82.02 | 115.21,82.02 v117.33,82.02 | v117.08,72.26 116.79,72.56 112.27,72.56 | R55.2 114.59,78.91 115.21,79.52 115.21,82.02 | 101.73,72.52 L4.1 | 101.73,72.52 101.77,72.56 109.47,72.56 | 112.27,72.56 109.47,72.56 | J52.1 109.6,72.43 109.47,72.56
  Bottom 0.152: v90.56,68.57 92.23,70.25 v95.3,70.25
  Bottom 0.305: v94.87,56.64 94.93,56.7 97.66,56.7 99.95,56.7 101.6,56.7 | 101.6,56.7 105.66,56.7 105.71,56.76 v105.71,59.56 | v101.6,57.85 101.6,56.7
  Bottom 0.61: v95,75.06 95.03,75.02 95.03,70.51 v95.3,70.25 | v115.57,55.63 115.57,56.64 v111.63,60.58 | v117.33,82.02 117.33,74.22 116.59,73.48 116.59,72.82 117.08,72.33 v117.08,72.26 | 86.23,67.06 86.23,69.84 86.92,70.52 87.63,70.52 | 86.23,67.06 v86.23,61.21 | v79.88,67.06 86.23,67.06 | 87.63,70.52 88.14,70.52 88.48,70.52 | v88.54,70.59 88.48,70.52 | 88.48,70.52 87.63,70.52
5V  (via drill 0.38)
  Top 0.152: R11.2 39.28,24.42 39.09,24.23 39.09,23.53 39.03,23.46 38.81,23.24 36.07,23.24 35.81,23.5 35.81,24.26 35.65,24.42 R12.2 34.43,24.42 34.31,24.54 34.31,26.16 34.32,26.17 34.32,26.77 34.46,26.9 35.66,26.9 35.94,27.18 35.94,27.81 35.74,28.02 33.48,28.02 33.22,27.76 33.22,27.02 33.08,26.89 31.21,26.89 30.99,26.67 30.99,25.65 30.74,25.41 28.64,25.41 28.5,25.55 U6.16 28.5,26.92 27.57,27.86 27.57,28.24 28.41,29.08 30.13,30.81 v34.1,30.81
  Top 0.508: C12.+ 33.34,34.86 U2.1 35.75,34.86 35.94,34.67 35.94,33.15 35.75,32.96 U2.3
  Top 0.61: D5.C C15.2 C14.1 30.86,33.79 D4.C 30.86,35.77 v31.14,36.05 32.66,36.05 32.89,35.81 C12.+ | v16.76,41.91 23.87,41.91 24.38,41.4 33.16,41.4 v33.19,41.36
  Bottom 0.152: v31.14,36.05 31.14,34.56 30.39,33.82 30.39,31.5 31.08,30.81 v34.1,30.81
  Bottom 0.61: U5.P$11 16.71,41.85 v16.76,41.91 | v33.19,41.36 33.19,36.62 32.62,36.05 v31.14,36.05
5V1  (via drill 0.38)
  Top 0.152: R25.2 95.67,24.42 95.48,24.23 95.48,23.53 95.41,23.46 95.2,23.24 92.46,23.24 92.2,23.5 92.2,24.26 92.04,24.42 R23.2 90.82,24.42 90.7,24.54 90.7,26.16 90.71,26.17 90.71,26.77 90.84,26.9 92.05,26.9 92.33,27.18 92.33,27.81 92.13,28.02 89.86,28.02 89.61,27.76 89.61,27.02 89.47,26.89 87.59,26.89 87.38,26.67 87.38,25.65 87.13,25.41 85.03,25.41 84.89,25.55 U11.16 84.89,26.92 83.96,27.86 83.96,28.24 84.8,29.08 86.52,30.81 v90.48,30.81 v90.49,30.81
  Top 0.508: C29.+ 89.73,34.86 U12.1 92.14,34.86 92.33,34.67 92.33,33.15 92.14,32.96 U12.3
  Top 0.61: D11.C C30.2 C28.1 87.25,33.79 D10.C 87.25,35.77 v87.53,36.05 89.05,36.05 89.28,35.81 C29.+ | v73.15,41.91 80.26,41.91 80.77,41.4 89.54,41.4 v89.58,41.36